# Allegro board flyer.brd
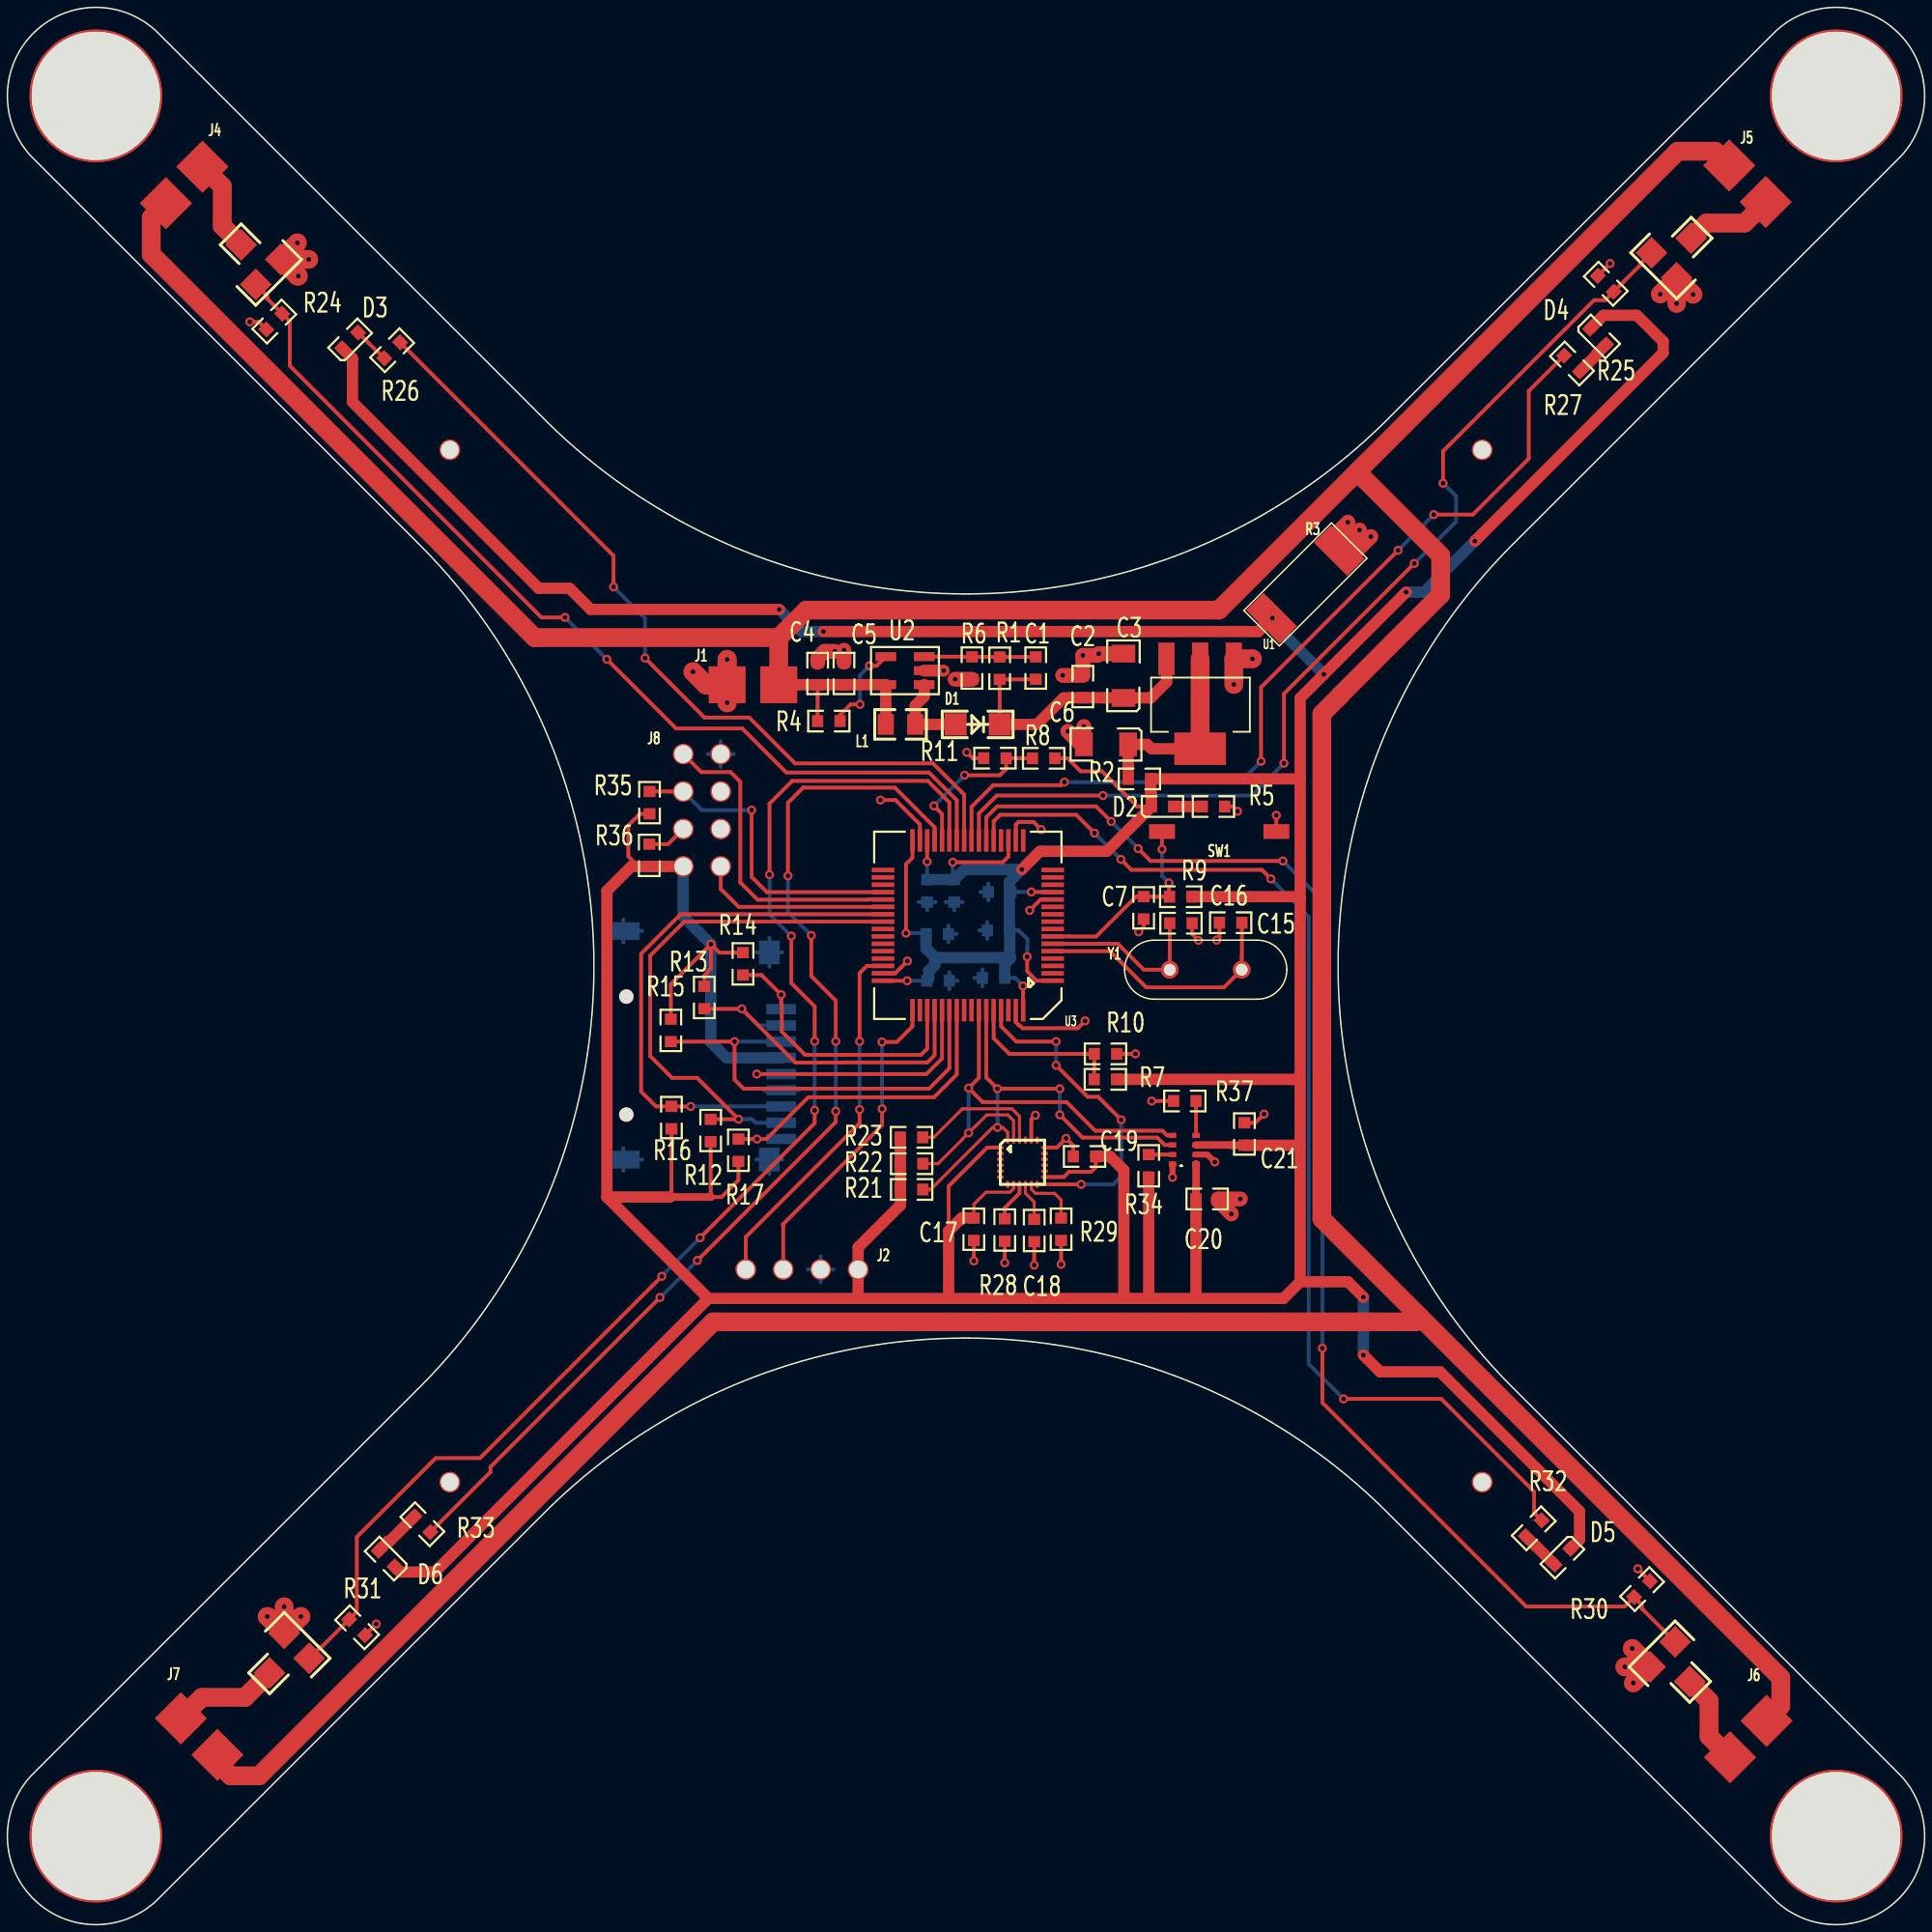
[diagram p0: board, top side]
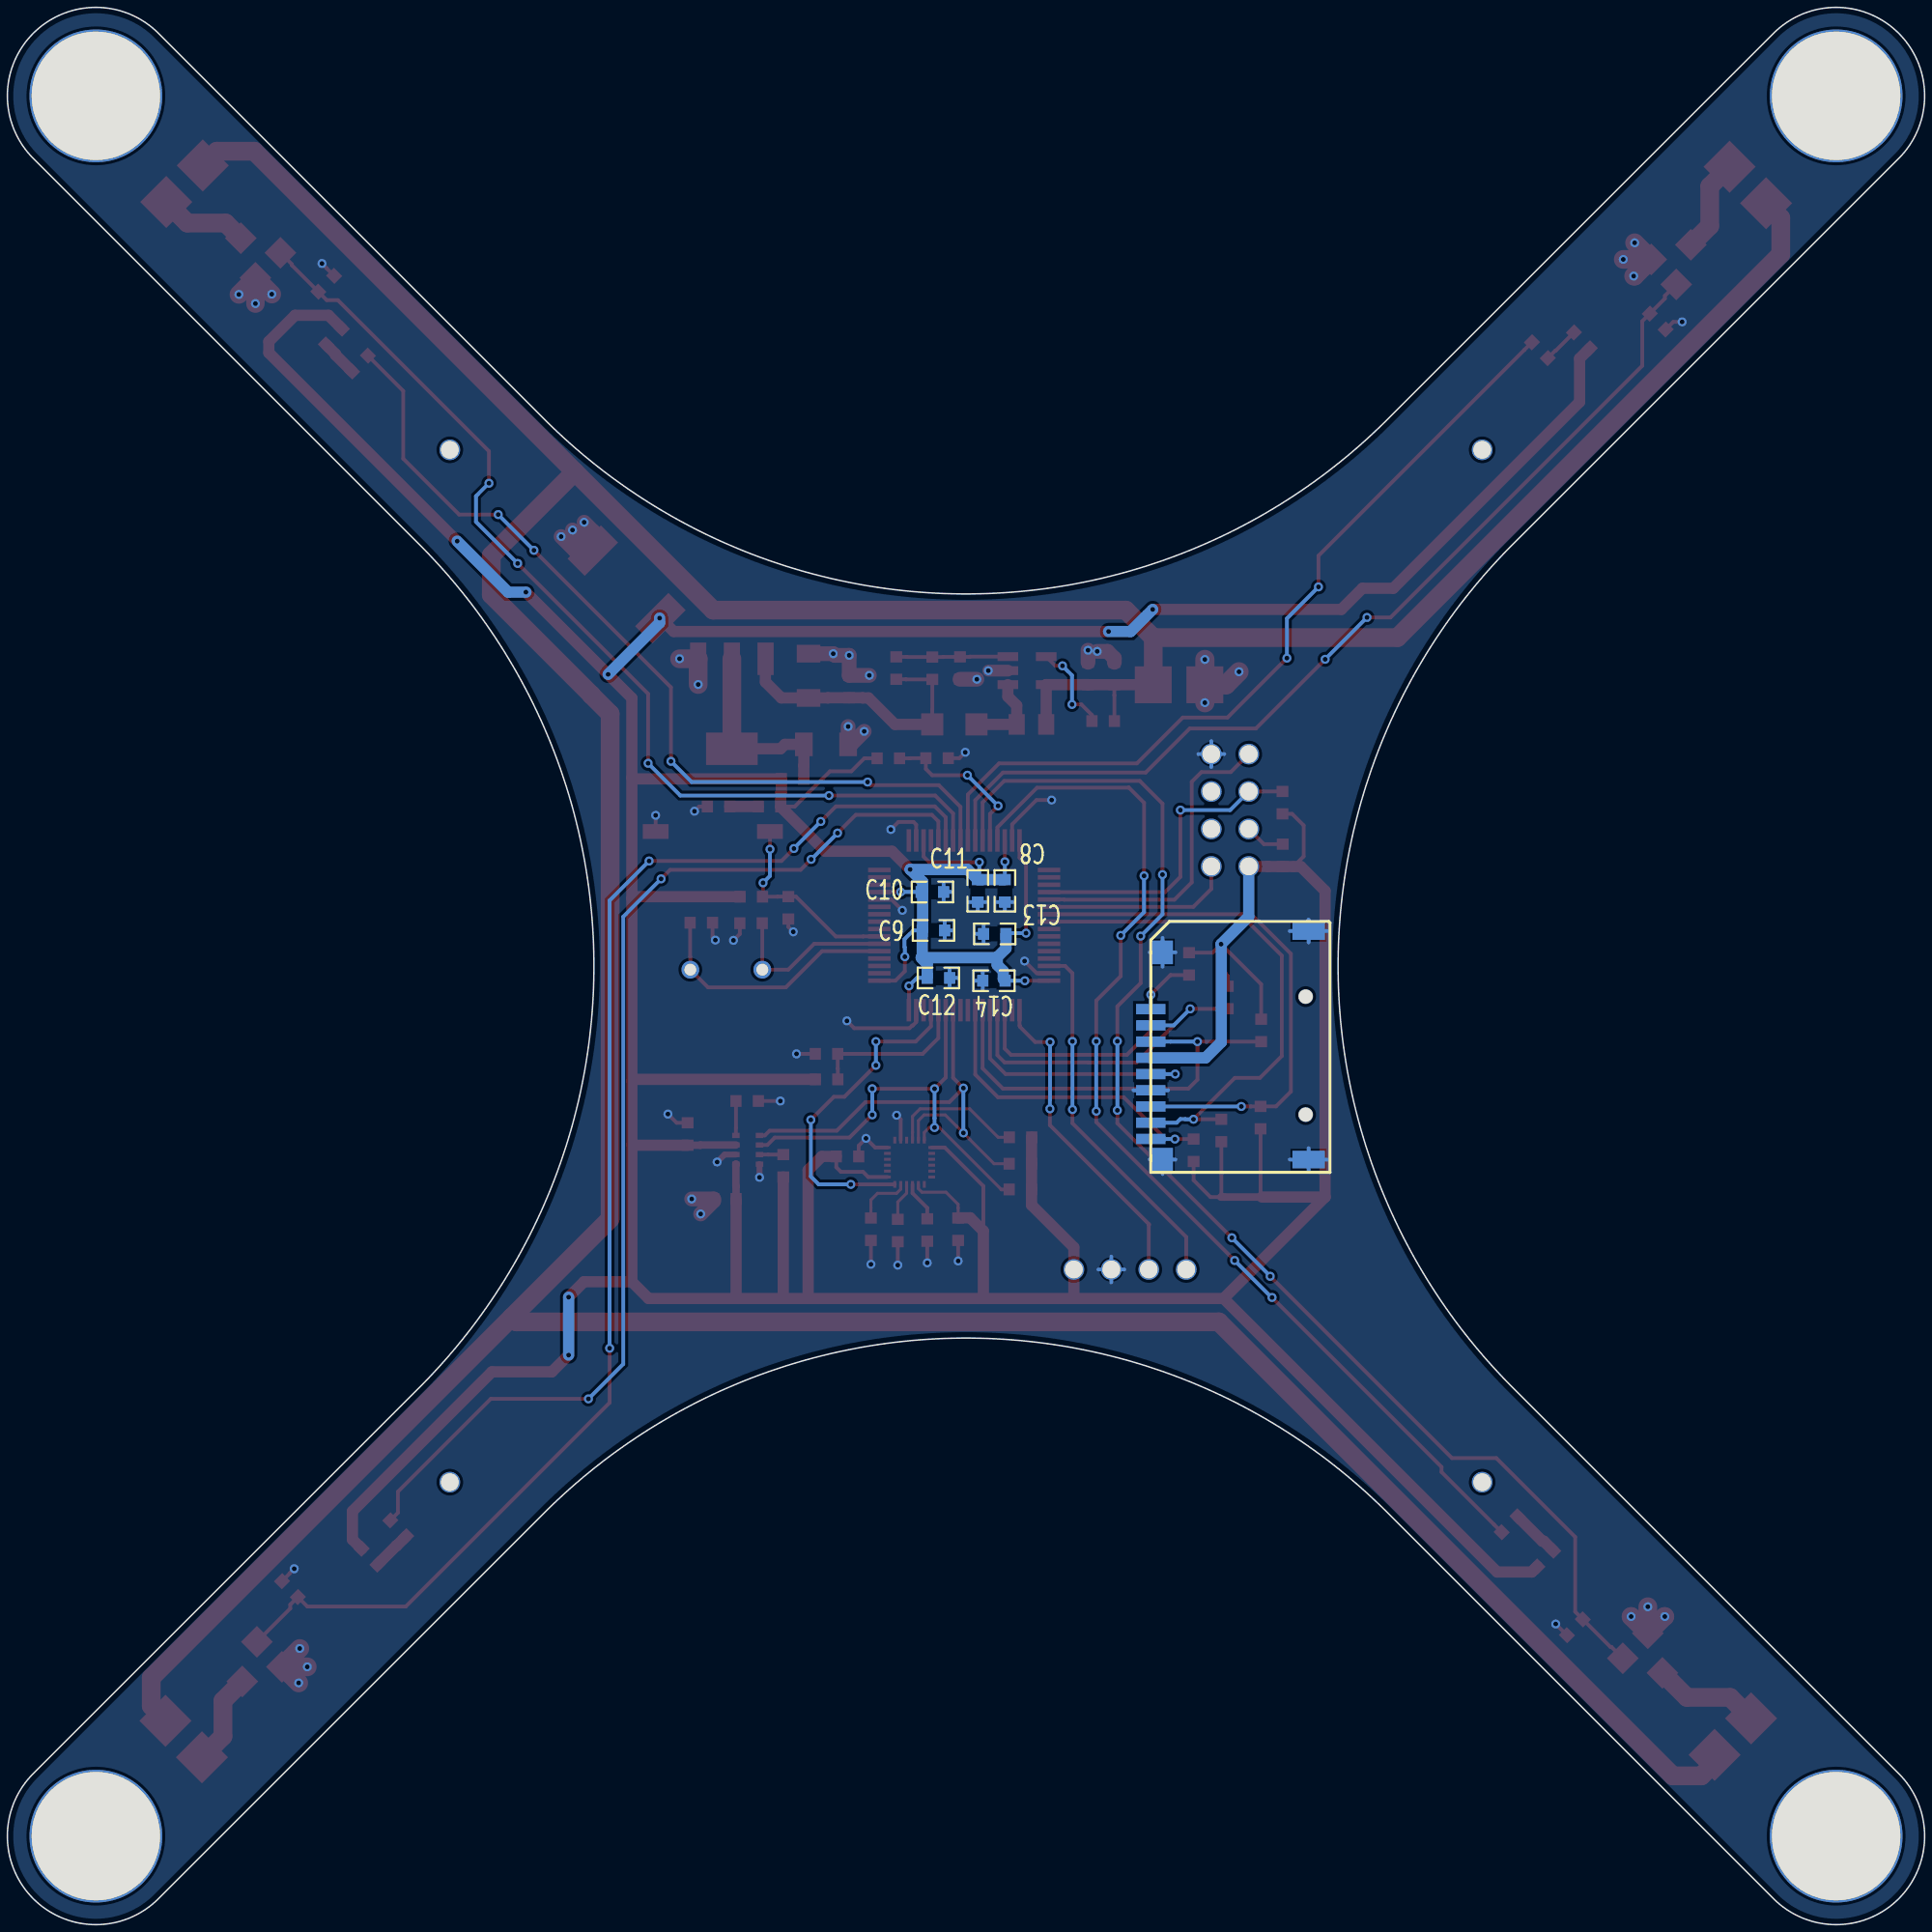
[diagram p1: board, bottom side, seen from below]

Outline 130 x 130 mm; copper layers: TOP, BOTTOM. Coordinates in mm from the lower left corner of the outline.

## Placement (name value [footprint] x y rotation side)
C1  470p  [NP0603]  69.73 85.2 90 top
C2  10u  [NP0603]  72.92 83.95 90 top
C3  10u  [P1206]  75.68 84.68 90 top
C4  100n  [NP0603]  54.94 84.84 90 top
C5  2.2u  [NP0603]  56.73 84.84 90 top
C6  22u  [P1206]  74.5 80.03 180 top
C7  10n  [NP0603]  77.05 68.95 90 top
C8  4.7u  [NP0603]  62.37 70.1 270 bottom
C9  1u  [NP0603]  67.21 67.42 180 bottom
C10  100n  [NP0603]  67.28 70.02 180 bottom
C11  100n  [NP0603]  64.2 70.1 270 bottom
C12  100n  [NP0603]  66.87 64.19 180 bottom
C13  100n  [NP0603]  63.05 67.18 0 bottom
C14  100n  [NP0603]  63.11 64 0 bottom
C15  20p  [NP0603]  82.95 67.94 180 top
C16  20p  [NP0603]  79.58 67.9 0 top
C17  10n  [NP0603]  65.54 47.16 270 top
C18  100n  [NP0603]  69.63 47.07 270 top
C19  100n  [NP0603]  73.04 52.09 180 top
C20  100n  [NP0603]  81.35 49.21 0 top
C21  100n  [NP0603]  83.88 53.61 90 top
D1  MBR0520  [SOD123]  65.89 81.38 180 top
D2  LED  [P0603]  78.32 75.82 0 top
D3  LED  [P0603]  23.24 107.42 45 top
D4  LED  [P0603]  107.86 107.68 315 top
D5  LED  [P0603]  105.44 24.95 225 top
D6  LED  [P0603]  25.72 24.82 135 top
J1  BAT  [PWR]  52.31 84.07 180 top
J2  SWD  [SIP_2D54_4P]  55.15 44.43 180 top
J3  TF_CARD  [TF]  52.47 62.08 90 bottom
J4  MOTOR1  [PWR]  10.75 116.72 45 top
J5  MOTOR2  [PWR]  116.75 119.28 315 top
J6  MOTOR3  [PWR]  119.28 13.82 225 top
J7  MOTOR4  [PWR]  14.24 11.51 135 top
J8  ESP8266  [DIP_2D54_8P]  45.83 79.37 270 top
L1  33uH  [NP0805]  60.56 81.38 0 top
NOREF  -  [unnamed]  65 65 0 top
NOREF#2  -  [unnamed#2]  30 100 0 top
NOREF#3  -  [unnamed#2]  30 30 0 top
NOREF#4  -  [unnamed#2]  100 30 0 top
NOREF#5  -  [unnamed#2]  100 100 0 top
R1  42k 1%  [NP0603]  67.29 85.19 90 top
R2  FUSE  [NP0603]  76.76 77.69 0 top
R3  5.6  [NP2512]  88.01 90.88 225 top
R4  51k  [NP0603]  55.7 81.61 0 top
R5  1k  [NP0603]  81.78 75.82 0 top
R6  13k 1%  [NP0603]  65.41 85.2 270 top
R7  10K  [NP0603]  74.45 57.32 0 top
R8  10K  [NP0603]  70.27 79.09 0 top
R9  10K  [NP0603]  79.56 69.7 180 top
R10  10K  [NP0603]  74.46 59.04 180 top
R11  10K  [NP0603]  66.96 79.09 0 top
R12  47k  [NP0603]  47.69 53.85 90 top
R13  47k  [NP0603]  47.25 62.87 270 top
R14  47k  [NP0603]  49.88 65.15 270 top
R15  47k  [NP0603]  44.99 60.63 270 top
R16  47k  [NP0603]  45.03 54.72 90 top
R17  10K  [NP0603]  49.57 52.51 90 top
R21  4k7  [NP0603]  61.32 49.85 0 top
R22  4k7  [NP0603]  61.32 51.6 0 top
R23  10K  [NP0603]  61.31 53.39 0 top
R24  10K  [NP0603]  18.1 108.7 225 top
R25  10K  [NP0603]  108.38 111.26 135 top
R26  1k  [NP0603]  26.09 106.76 45 top
R27  1k  [NP0603]  106.09 105.85 135 top
R28  10K  [NP0603]  67.63 47.1 270 top
R29  10K  [NP0603]  71.45 47.16 270 top
R30  10K  [NP0603]  110.84 22.75 45 top
R31  10K  [NP0603]  23.72 20.16 315 top
R32  1k  [NP0603]  103.5 26.88 45 top
R33  1k  [NP0603]  28.14 27.15 315 top
R34  10K  [NP0603]  77.39 51.46 90 top
R35  10K  [NP0603]  43.54 76.08 90 top
R36  10K  [NP0603]  43.53 72.5 90 top
R37  10K  [NP0603]  79.84 55.85 180 top
SW1  sw_rst  [SW_RST]  82.17 74.12 180 top
U1  AMS1117_3V3  [SOT223]  80.88 82.78 180 top
U2  LM27313  [SOT23_5]  60.86 85.03 90 top
U3  STM32F401RBT6_PX  [LQFP64]  65.13 67.76 180 top
U4  SI2302DS  [SOT23_3]  16.84 109.8 45 top
U5  SI2302DS  [SOT23_3]  110.07 113.36 315 top
U6  MPU9250  [QFN24]  68.83 51.7 0 top
U7  SI2302DS  [SOT23_3]  113.08 20.59 225 top
U8  SI2302DS  [SOT23_3]  21.88 18.06 135 top
U9  BMP280  [LGA8]  79.8 52.54 180 top
Y1  8M  [HC49]  81.26 64.75 0 top

## Library data of the parts
C1 C2 C4 C5 C7-C21 = CAP NP
C3 C6 = CAP
D1 = MBR0520
D2-D6 = LED
J1 J4-J7 = HEADER 2
J2 = 4 HEADER
J3 = TF_CARD
J8 = HEADER 4X2
L1 = CHOKE
R1-R17 R21-R37 = R
SW1 = SW PUSHBUTTON
U1 = AMS1117_3V3
U2 = LM27313
U3 = STM32F401RBT6_PX
U4 U5 U7 U8 = SI2302DS
U6 = MPU9250
U9 = BMP280
Y1 = ZTA

## Footprints (pads in the part's own frame, mm; a bottom-side part is the same pattern mirrored in y, then rotated)
DIP_2D54_8P
  round 1.4 hole 1.2: 1(0,0) 2(0,2.54) 3(2.54,0) 4(2.54,2.54) 5(5.08,0) 6(5.08,2.54) 7(7.62,0) 8(7.62,2.54)
HC49
  round 1.2 hole 0.8: 1(-2.44,0) 2(2.44,0)
LGA8
  rect 0.508x0.356 smd: 1(0.8,0.975) 2(0.8,0.325) 3(0.8,-0.325) 4(0.8,-0.975) 5(-0.8,-0.975) 6(-0.8,-0.325) 7(-0.8,0.325) 8(-0.8,0.975)
LQFP64
  rect 1.524x0.305 smd: 1(-5.753,3.753) 2(-5.753,3.252) 3(-5.753,2.752) 4(-5.753,2.252) 5(-5.753,1.751) 6(-5.753,1.251) 7(-5.753,0.751) 8(-5.753,0.25) 9(-5.753,-0.25) 10(-5.753,-0.751) 11(-5.753,-1.251) 12(-5.753,-1.751) 13(-5.753,-2.252) 14(-5.753,-2.752) 15(-5.753,-3.252) 16(-5.753,-3.753) 33(5.753,-3.753) 34(5.753,-3.252) 35(5.753,-2.752) 36(5.753,-2.252) 37(5.753,-1.751) 38(5.753,-1.251) 39(5.753,-0.751) 40(5.753,-0.25) 41(5.753,0.25) 42(5.753,0.751) 43(5.753,1.251) 44(5.753,1.751) 45(5.753,2.252) 46(5.753,2.752) 47(5.753,3.252) 48(5.753,3.753)
  rect 0.305x1.524 smd: 17(-3.753,-5.753) 18(-3.252,-5.753) 19(-2.752,-5.753) 20(-2.252,-5.753) 21(-1.751,-5.753) 22(-1.251,-5.753) 23(-0.751,-5.753) 24(-0.25,-5.753) 25(0.25,-5.753) 26(0.751,-5.753) 27(1.251,-5.753) 28(1.751,-5.753) 29(2.252,-5.753) 30(2.752,-5.753) 31(3.252,-5.753) 32(3.753,-5.753) 49(3.753,5.753) 50(3.252,5.753) 51(2.752,5.753) 52(2.252,5.753) 53(1.751,5.753) 54(1.251,5.753) 55(0.751,5.753) 56(0.25,5.753) 57(-0.25,5.753) 58(-0.751,5.753) 59(-1.251,5.753) 60(-1.751,5.753) 61(-2.252,5.753) 62(-2.752,5.753) 63(-3.252,5.753) 64(-3.753,5.753)
NP0603
  rect 0.76x0.8 smd: 1(-0.76,0) 2(0.76,0)
NP0805
  rect 1.092x1.397 smd: 1(-1,0) 2(1,0)
NP2512
  rect 1.65x3.2 smd: 1(3.24,0) 2(-3.24,0)
P0603
  rect 0.76x0.8 smd: 1(-0.76,0) 2(0.76,0)
P1206
  rect 1.2x1.6 smd: 1(-1.5,0) 2(1.5,0)
PWR
  rect 2.5x2.5 smd: 1(0,0) 2(3.5,0)
QFN24
  rect 0.457x0.203 smd: 1(-1.5,1) 2(-1.5,0.6) 3(-1.5,0.2) 4(-1.5,-0.2) 5(-1.5,-0.6) 6(-1.5,-1) 13(1.5,-1) 14(1.5,-0.6) 15(1.5,-0.2) 16(1.5,0.2) 17(1.5,0.6) 18(1.5,1)
  rect 0.203x0.457 smd: 7(-1,-1.5) 8(-0.6,-1.5) 9(-0.2,-1.5) 10(0.2,-1.5) 11(0.6,-1.5) 12(1,-1.5) 19(1,1.5) 20(0.6,1.5) 21(0.2,1.5) 22(-0.2,1.5) 23(-0.6,1.5) 24(-1,1.5)
SIP_2D54_4P
  round 1.4 hole 1.2: 1(-2.54,0) 2(0,0) 3(2.54,0) 4(5.08,0)
SOD123
  rect 1.499x1.499 smd: 1(-1.4,0) 2(1.6,0)
SOT23_3
  rect 1.524x1.524 smd: 1(1,1) 2(3.4,1) 3(2.2,3.6)
SOT23_5
  rect 0.6x1.4 smd: 1(-0.95,-1.3) 2(0,-1.3) 3(0.95,-1.3) 4(0.95,1.3) 5(-0.95,1.3)
SOT223
  rect 1.1x2.2 smd: 1(-2.285,-3.05) 2(0,-3.05) 3(2.285,-3.05)
  rect 3.5x2.2 smd: 4(0,3.05)
SW_RST
  rect 1.75x1 smd: 1(3.875,0) 2(-3.875,0)
TF
  round 1 hole 0.95 unplated: (-7.15,-10.5) (0.85,-10.5)
  rect 0.7x2 smd: 1(0,0) 2(-1.1,0) 3(-2.2,0) 4(-3.3,0) 5(-4.4,0) 6(-5.5,0) 7(-6.6,0) 8(-7.7,0) 9(-8.8,0)
  rect 1.6x1.4 smd: 10(-10.2,-0.8) 11(3.85,-0.8)
  rect 1.2x2.2 smd: 12(-10.2,-10.7) 13(5.3,-10.7)
unnamed
  round 9 hole 8.7: (-59,59) (-59,-59) (59,59) (59,-59)
unnamed#2
  round 1.4 hole 1.2: (0,0)

## Nets
GND: C2.2 C3.2 C4.2 C5.2 C6.2 C7.1 C8.2 C9.2 C10.2 C11.2 C12.2 C13.2 C14.2 C15.2 C16.2 C17.2 C18.2 C19.2 C20.2 C21.2 J1.2 J2.2 J3.6 J3.10 J3.11 J3.12 J3.13 J8.2 R3.2 R5.2 R6.2 R10.1 R11.1 R24.2 R25.2 R28.2 R29.2 R30.2 R31.2 R37.2 SW1.2 U1.1(GND) U2.2(GND) U3.12(VSSA) U3.18(VSS_18) U3.31(VSS_31) U3.47(VSS_47) U3.63(VSS_63) U4.2(SOURCE) U5.2(SOURCE) U6.18(GND1) U6.20(GND2) U7.2(SOURCE) U8.2(SOURCE) U9.1(GND1) U9.7(GND7)
V3D3: C8.1 C9.1 C10.1 C11.1 C12.1 C13.1 C14.1 C17.1 C19.1 C20.1 C21.1 D2.1 D3.1 D4.1 D5.1 D6.1 J2.1 J3.4 J8.7 R2.2 R3.1 R7.2 R8.2 R9.1 R12.1 R13.1 R14.1 R15.1 R16.1 R17.1 R21.1 R22.1 R23.1 R34.1 R35.1 R36.1 U3.1(VBAT) U3.13(VDDA) U3.19(VDD_19) U3.30(VCAP_1) U3.32(VDD_32) U3.48(VDD_48) U3.64(VDD_64) U6.1(RESV1) U6.8(VDDIO) U6.13(VDD) U9.6(VDDIO) U9.8(VDD)
V3D3P: C6.1 R2.1 U1.2(VOUT) U1.4(OUT)
V5D0: C1.1 C2.1 C3.1 D1.1 R1.1 U1.3(VIN)
VBAT: C4.1 C5.1 J1.1 J4.1 J5.1 J6.1 J7.1 L1.1 R4.1 U2.5(VIN)
BOOT0: R7.1 R10.2 U3.60(BOOT0)
BOOT1: R8.1 R11.2 U3.28(BOOT1)
CD: J3.9 R17.2 U3.55(PB3)
CHPD: J8.3 R35.2 U3.36(PB15)
CMD: J3.3 R15.2 U3.54(PD2)
D0: J3.7 R16.2 U3.39(PC8)
D1: J3.8 R12.2 U3.40(PC9)
D2: J3.1 R14.2 U3.51(PC10)
D3: J3.2 R13.2 U3.52(PC11)
ERST: J8.5 R36.2
INT0: U3.61(PB8) U6.12(INT)
LED1: R26.2 U3.25(PC5)
LED2: R27.2 U3.24(PC4)
LED3: R33.2 U3.29(PB10)
LED4: R32.2 U3.21(PA5)
NRST: C7.2 R9.2 SW1.1 U3.7(NRST)
OSC_IN: C15.1 U3.5(OSC_IN) Y1.2
OSC_OUT: C16.1 U3.6(OSC_OUT) Y1.1
PWM1: R24.1 U3.26(PB0) U4.1(GATE)
PWM2: R25.1 U3.23(PA7) U5.1(GATE)
PWM3: R31.1 U3.27(PB1) U8.1(GATE)
PWM4: R30.1 U3.22(PA6) U7.1(GATE)
RX1: J8.8 U3.38(PC7)
SCL1: R22.2 U3.58(PB6) U6.23(SCL) U9.4(SCL)
SDA1: R21.2 U3.59(PB7) U6.24(SDA) U9.3(SDA)
SWCLK: J2.3 U3.49(PA14)
SWDIO: J2.4 U3.46(PA13)
TCLK: J3.5 U3.53(PC12)
TX1: J8.1 U3.37(PC6)
N152508: J4.2 U4.3(DRAIN)
N152808: D3.2 R26.1
N153644: D2.2 R5.1
N164608: C1.2 R1.2 R6.1 U2.3(FB)
N164640: D1.2 L1.2 U2.1(SW)
N164696: R4.2 U2.4(NSHDN)
N165608: J5.2 U5.3(DRAIN)
N165666: D4.2 R27.1
N166858: J6.2 U7.3(DRAIN)
N166964: J7.2 U8.3(DRAIN)
N167022: D6.2 R33.1
N167070: D5.2 R32.1
N184406: R28.1 U6.9(ADO)
N184550: C18.1 U6.10(REGOUT)
N251743: R23.2 U6.22(NCS)
N267263: R37.1 U9.5(SDO)
N268631: R34.2 U9.2(CSB)
N270769: R29.1 U6.11(FSYNC)

Pads without a net: J8 4 6; U3 2 3 4 8 9 10 11 14 15 16 17 20 33 34 35 41 42 43 44 45 50 56 57 62; U6 2 3 4 5 6 7 14 15 16 17 19 21

## Via types
v1: diameter 0.61, hole 0.33, TOP to BOTTOM, 134 vias

## Routing (per net, layer and track width the routed paths; a pad name or vN(x,y) marks a point on that pad's centre or on a via; arc(x,y) is an arc through that point)
GND: length 134.2
  TOP w0.254: U3.18 68.38,74.59 68.56,74.77 69.59,74.77 v1(70.1,74.26) ; R37.2 v1(77.59,55.85) ; R10.1 v1(76.5,59.04) ; R28.2 v1(67.63,44.87) ; v1(82,66.76) 82.19,66.95 C15.2 ; U6.20 69.43,54.6 v1(69.71,54.88) ; C19.2 72.28,52.82 v1(71.78,53.31) 71.16,52.7 U6.18 ; U3.12 70.06,69.51 v1(69.32,68.78) ; v1(110.55,24.13) 110.86,23.82 110.86,23.81 R30.2 ; v1(16.45,108.68) 17.04,108.68 R24.2 ; C21.2 84.62,54.37 v1(85.21,54.96) ; U3.47 60.2,64.51 v1(61.03,65.34) ; v1(76.71,67.32) 77.05,67.66 C7.1 ; v1(108.67,112.63) 108.36,112.33 108.36,112.32 R25.2 ; SW1.2 v1(86.04,75.22) ; R29.2 v1(71.45,44.78) ; v1(80.77,66.74) 80.34,67.17 C16.2 ; U3.31 61.87,74.61 60.22,76.26 v1(59.2,76.26) ; C18.2 v1(69.63,44.72) ; v1(73.08,61.28) 72.58,60.79 68.83,60.79 68.65,60.97 68.61,60.97 68.38,61.2 U3.63 ; R31.2 v1(25.02,20.39) ; R11.1 65.45,79.09 v1(65.05,79.49) ; C17.2 v1(65.54,45) ; R5.2 83.09,75.82 v1(83.41,75.5)
  TOP w0.4: U9.1 v1(79,50.67) ; v1(81.87,51.71) 81.37,52.22 U9.7
  TOP w0.8: U2.2 v1(63.49,85.03)
  TOP w1: v1(71.56,84.71) C2.2 v1(72.92,86.07) 73.89,86.07 v1(74.01,86.18) C3.2 ; v1(92.46,94.12) 91.5,93.17 R3.2 90.31,93.19 ; v1(83.6,49.21) C20.2 82.11,49.07 v1(82.99,48.19) ; 90.31,93.19 v1(91.68,94.57) ; 90.31,93.19 90.31,94.5 v1(90.9,95.09) ; C4.2 54.94,85.87 55.41,86.34 v1(56.11,86.34) ; C5.2 v1(56.73,86.41) ; v1(73,81.24) C6.2 72.79,80.03 v1(71.91,80.91) ; R6.2 v1(64.27,84.44)
  TOP w1.25: v1(112.07,110.56) 113.18,111.67 U5.2 113.18,111.66 ; 113.18,111.66 v1(113.18,109.92) ; 113.18,111.66 v1(114.31,110.54)
  TOP w1.27: U4.2 v1(19.66,114.04) ; U4.2 19.67,111.78 v1(19.73,111.78) ; U4.2 v1(20.44,112.91) ; U8.2 19.9,20.89 v1(19.9,20.89) ; U8.2 17.64,20.89 v1(17.62,20.89) ; U8.2 v1(18.77,21.56) ; v1(83.16,84.09) U1.1 v1(84.42,85.83) ; v1(110.18,18.73) 111.39,17.52 U7.2 111.34,17.48 ; 111.34,17.48 v1(109.67,17.48) ; 111.34,17.48 v1(110.25,16.39)
  TOP w1.3: J1.2 v1(48.81,82.86) ; J1.2 47.37,84.07 v1(46.49,84.95) ; J1.2 v1(48.81,85.79)
  BOTTOM w0.254: J3.12 41.77,52.65 ; J3.12 40.49,51.88 ; J3.12 43.05,51.88 ; J3.12 41.77,51.1 ; 51.29,56.58 J3.6 53.65,56.58 ; J3.11 51.67,66.9 ; J3.11 51.67,64.95 ; J3.11 52.55,65.93 ; J3.11 50.79,65.93 ; C14.2 64.42,64 ; C14.2 63.87,63.43 ; C14.2 63.87,64.58 ; 40.49,67.38 J3.13 ; J3.13 41.77,68.15 ; J3.13 43.05,67.38 ; J3.13 41.77,66.6 ; 65.96,70.02 C10.2 ; C10.2 66.52,69.44 ; C10.2 66.52,70.6 ; 62.37,68.78 C8.2 ; C8.2 61.79,69.34 ; C8.2 62.94,69.34 ; 47.49,79.37 J8.2 ; J8.2 48.37,78.5 ; J8.2 48.37,80.25 ; J8.2 49.25,79.37 ; 65.89,67.42 C9.2 ; C9.2 66.45,67.99 ; C9.2 66.45,66.84 ; J2.2 55.15,45.3 ; J2.2 54.27,44.43 ; J2.2 55.15,43.55 ; J2.2 56.03,44.43 ; 50.79,51.88 J3.10 ; J3.10 52.55,51.88 ; J3.10 51.67,50.9 ; C11.2 64.78,69.34 ; C11.2 64.2,68.78 ; C11.2 63.63,69.34 ; 66.11,63.62 C12.2 ; C12.2 66.11,64.77 ; C12.2 65.55,64.19 ; 63.81,66.6 C13.2 ; C13.2 63.81,67.76 ; C13.2 64.37,67.18
V3D3: length 525.4
  TOP w0.203: C17.1 65.54,48.6 65.54,48.61 65.54,48.85 66.36,49.67 67.99,49.67 68.23,49.9 U6.8
  TOP w0.254: D2.1 76.61,75.82 74.22,78.2 72.78,78.2 71.89,79.09 R8.2 ; R16.1 45.03,49.43 44.93,49.34 ; v1(68.87,63.65) 68.87,62.02 U3.64 ; v1(69.43,70.02) 70.87,70.02 U3.13 ; 42.8,71.74 42.11,72.43 42.11,74.54 42.89,75.32 R35.1 ; v1(47.71,66.48) 44.99,63.77 R15.1 ; v1(47.71,66.48) 47.71,64.82 47.4,64.52 47.4,64.48 47.25,64.34 R13.1 ; v1(47.71,66.48) 48.28,65.91 R14.1 ; 47.47,49.34 47.69,49.56 R12.1 ; v1(61.01,64) 59.38,64 U3.48 ; C19.1 73.8,51.36 73.49,51.05 71.99,51.05 71.64,50.7 U6.13 ; v1(62.37,72.07) 62.37,73.5 U3.30 ; v1(64.1,72.04) 67.5,72.04 67.88,72.42 U3.19 ; U6.1 66.44,52.7 63.83,50.08 63.83,47.03 ; v1(60.93,67.23) 60.93,71.91 61.37,72.35 U3.32 ; v1(69.15,65.63) 69.15,64.65 69.79,64.01 U3.1 ; R17.1 49.57,50.48 48.43,49.34 47.73,49.34
  TOP w0.508: C20.1 80.59,50.06 80.6,50.07 U9.8 ; C21.1 83.02,52.85 83.01,52.87 U9.6 ; 44.93,49.34 47.73,49.34
  TOP w0.762: 87.66,77.77 87.66,69.59 ; 87.66,77.77 87.57,77.69 R2.2 77.52,76.77 77.56,76.72 D2.1 77.56,75.8 74.55,72.78 70.02,72.78 v1(68.79,71.55) ; 87.66,77.77 87.66,83.17 v1(89.27,84.78) v1(94.84,90.35) ; 87.66,69.59 87.66,57.23 ; 87.66,69.59 87.55,69.7 R9.1 ; 77.43,42.46 77.39,42.5 R34.1 ; 77.43,42.46 75.69,42.46 ; 77.43,42.46 80.61,42.46 ; 75.69,42.46 75.71,42.48 75.71,51.16 74.78,52.09 C19.1 ; 75.69,42.46 63.83,42.46 ; 87.66,57.23 87.57,57.32 R7.2 ; 87.66,57.23 87.66,52.91 ; 40.66,49.34 47.53,42.46 ; 40.66,49.34 44.93,49.34 ; 40.66,49.34 40.66,70.1 42.3,71.74 R36.1 44.51,71.74 44.52,71.75 J8.7 ; 47.53,42.46 28.99,23.91 26.63,23.91 D6.1 ; 47.53,42.46 57.7,42.46 ; v1(55.33,87.68) 84.82,87.68 R3.1 85.72,88.54 ; D5.1 106.6,26.11 106.6,28.03 97.15,37.49 93.08,37.49 v1(91.95,38.62) ; 80.61,42.46 86.52,42.46 87.66,43.59 ; 80.61,42.46 80.59,42.48 C20.1 ; 87.66,43.59 90.9,43.59 v1(91.95,42.55) ; 87.66,43.59 87.66,52.91 ; 87.66,52.91 87.6,52.85 C21.1 ; 57.7,42.46 57.69,42.47 J2.1 57.69,45.92 60.56,48.79 60.56,49.85 R21.1 R22.1 60.56,53.38 R23.1 ; 57.7,42.46 63.83,42.46 ; v1(52.34,89.18) 39.55,89.18 38.12,90.61 36.03,90.61 23.4,103.24 23.4,106.19 D3.1 ; 63.83,42.46 63.83,47.03 64.72,47.93 65.52,47.93 C17.1 ; v1(99.5,93.81) 112.27,106.58 112.27,107.34 110.5,109.12 108.23,109.12 D4.1
  BOTTOM w0.254: C12.1 68.33,64.19 v1(68.87,63.65) ; v1(64.1,72.04) 64.1,70.96 C11.1 ; C8.1 v1(62.37,72.07) ; v1(69.15,65.63) 69.15,66.27 69.17,66.29 69.17,66.81 68.57,67.42 C9.1 ; C14.1 v1(61.01,64) ; C13.1 62.24,67.23 v1(60.93,67.23) ; C10.1 v1(69.43,70.02)
  BOTTOM w0.762: 67.94,70.12 67.94,67.44 C9.1 67.97,65.5 67.81,65.34 ; 67.94,70.12 C10.1 ; 67.94,70.12 67.94,70.71 68.78,71.55 ; 62.89,65.6 62.29,66.2 C13.1 ; 62.89,65.6 62.92,65.57 68.04,65.57 67.81,65.34 ; 62.89,65.6 62.89,65.07 62.48,64.66 62.48,64.13 C14.1 ; v1(55.33,87.68) 53.84,87.68 v1(52.34,89.18) ; v1(94.84,90.35) 96.04,90.35 v1(99.5,93.81) ; 67.81,65.34 67.63,65.16 C12.1 ; J8.7 45.83,68.36 v1(47.71,66.48) 47.7,66.47 47.7,59.84 48.76,58.78 J3.4 ; v1(85.78,88.59) 85.78,88.27 v1(89.27,84.78) ; 68.78,71.55 v1(68.79,71.55) ; 68.78,71.55 64.9,71.55 C11.1 C8.1 ; v1(91.95,42.55) v1(91.95,38.62)
V3D3P: length 13.5
  TOP w0.762: U1.4 77.58,79.73 77.28,80.03 C6.1 76,78.6 76,78.6 R2.1
  TOP w1.27: U1.4 U1.2
V5D0: length 19.6
  TOP w0.254: D1.1 67.29,82.39 67.29,82.39 R1.1 69.07,84.43 69.08,84.44 C1.1
  TOP w0.762: D1.1 69.82,81.38 71.61,83.18 72.01,83.18 72.02,83.19 C2.1 74.36,83.19 74.37,83.18 C3.1 77.52,83.18 78.6,84.26 78.6,85.82 U1.3
VBAT: length 350.3
  TOP w0.254: C4.1 54.94,83.37 54.94,83.36 R4.1
  TOP w0.762: L1.1 U2.5 59.56,84.08 C5.1 56.73,84.08 C4.1 52.31,84.08
  TOP w1.27: J6.1 119.28,13.87 120.25,14.84 120.25,16.74 95.8,41.19 ; 95.8,41.19 89.13,47.86 89.13,82.1 90.4,83.37 90.4,83.39 97.19,90.18 97.19,92.84 91.56,98.48 91.56,98.54 ; 95.8,41.19 95.48,40.87 47.86,40.87 17.07,10.09 15.14,10.09 14.24,10.99 J7.1 ; 52.31,84.08 J1.1 52.31,87.27 ; 91.56,98.54 113.26,120.25 115.8,120.25 116.75,119.3 J5.1 ; 91.56,98.54 82.15,89.13 54.17,89.13 52.31,87.27 ; 52.31,87.27 35.75,87.27 9.76,113.26 9.76,115.73 J4.1
BOOT0: length 10.9
  TOP w0.254: U3.60 66.88,60.11 67.95,59.04 67.95,59.04 R10.2 73.7,58.05 73.69,58.05 R7.1
BOOT1: length 11
  TOP w0.254: 63.38,73.51 63.38,75.31 v1(62.83,75.86) ; R8.1 68.8,79.09 68.79,79.09 R11.2 67.73,78.36 67.3,77.94 v1(64.91,77.94)
  BOTTOM w0.254: v1(64.91,77.94) 64.72,77.75 64.72,77.75 v1(62.83,75.86)
CD: length 22.6
  TOP w0.254: R17.2 v1(50.84,53.27) 51.47,53.27 54.31,56.1 62.84,56.1 64.38,57.64 U3.55
  BOTTOM w0.254: v1(50.84,53.27) 52.46,53.27 J3.9
CHPD: length 21.3
  TOP w0.254: U3.36 51.5,70.01 50.47,71.05 v1(50.47,75.58) ; J8.3 44.88,76.83 44.87,76.84 R35.2
  BOTTOM w0.254: v1(50.47,75.58) 47.09,75.58 J8.3
CMD: length 29.4
  TOP w0.254: R15.2 v1(49.31,59.87) 49.31,57.3 49.92,56.69 62.5,56.69 63.88,58.06 U3.54
  BOTTOM w0.254: J3.3 51.14,59.88 51.14,59.87 v1(49.31,59.87)
D0: length 36.8
  TOP w0.254: v1(46.33,55.48) 45.69,55.48 45.68,55.48 R16.2 43.98,55.48 42.97,56.49 42.97,65.83 45.65,68.51 U3.39
  BOTTOM w0.254: J3.7 v1(46.33,55.48)
D1: length 36.2
  TOP w0.254: R12.2 47.69,54.61 v1(49.58,54.61) 46.77,57.42 45.07,57.42 43.59,58.9 43.59,65.71 45.89,68.01 U3.40
  BOTTOM w0.254: J3.8 50.72,54.38 50.47,54.62 50.15,54.62 50.14,54.61 v1(49.58,54.61)
D2: length 19.9
  TOP w0.254: R14.2 51.11,64.39 51.11,64.38 51.14,64.38 v1(52.47,63.06) 52.47,62.42 52.51,62.39 52.51,60.56 54.09,58.98 57.5,58.98 57.51,58.98 61.95,58.98 62.37,59.4 U3.51
  BOTTOM w0.254: J3.1 v1(52.47,63.06)
D3: length 23.5
  TOP w0.254: U3.52 62.88,58.95 62.39,58.47 56.72,58.47 56.71,58.46 53.44,58.46 v1(49.8,62.09) 48,62.09 47.98,62.11 R13.2
  BOTTOM w0.254: J3.2 50.92,60.98 v1(49.8,62.09)
ERST: length 2.7
  TOP w0.254: J8.5 44.8,73.26 R36.2
INT0: length 22.6
  TOP w0.254: v1(71.11,59.88) 68.42,59.88 67.38,60.92 U3.61 ; v1(75.52,54.57) 73.96,56.13 73.25,56.13 v1(71.11,58.27) ; U6.12 v1(72.81,50.2)
  BOTTOM w0.254: v1(75.52,54.57) 75.52,50.73 74.99,50.2 v1(72.81,50.2) ; v1(71.11,58.27) v1(71.11,59.88)
LED1: length 56.9
  TOP w0.254: v1(43.24,85.88) 47.27,81.85 50.3,81.85 53.41,78.74 62.76,78.74 64.88,76.63 U3.25 ; v1(41.1,90.71) 41.1,92.82 27.14,106.78 R26.2
  BOTTOM w0.254: v1(41.1,90.71) 43.24,88.57 v1(43.24,85.88)
LED2: length 60.8
  TOP w0.254: v1(71.67,77.48) 71.46,77.26 66.85,77.26 65.38,75.8 U3.24 ; v1(94.3,93.19) 85.01,83.9 v1(85.01,78.88) ; R27.2 103.16,103.99 103.16,99.4 99.37,95.61 v1(96.72,95.61)
  BOTTOM w0.254: v1(71.67,77.48) 83.6,77.48 v1(85.01,78.88) ; v1(94.3,93.19) v1(96.72,95.61)
LED3: length 74.6
  TOP w0.254: v1(44.25,42.53) 32.76,31.03 32.76,30.69 29.2,27.13 R33.2 ; v1(56.17,59.89) 56.17,62.65 54.51,64.31 v1(54.51,67.07) ; U3.29 62.88,74.4 60.19,77.09 53.99,77.09 53.97,77.11 52.93,76.07 v1(52.93,71.12) ; v1(56.17,55.15) 56.17,54.42 v1(46.79,45.04)
  BOTTOM w0.254: v1(52.93,71.12) 52.93,68.66 v1(54.51,67.07) ; v1(56.17,59.89) v1(56.17,55.15) ; v1(46.79,45.04) 44.28,42.53 v1(44.25,42.53)
LED4: length 77.1
  TOP w0.254: U3.21 66.88,74.81 67.32,75.25 72.48,75.25 v1(73.71,74.01) ; v1(85.68,70.91) 85.07,71.52 76.22,71.52 v1(75.5,72.24) ; R32.2 103.52,27.93 103.52,29.36 97.23,35.65 v1(90.6,35.65)
  BOTTOM w0.254: v1(85.68,70.91) 88.24,68.35 88.24,38.01 v1(90.6,35.65) ; v1(75.5,72.24) 75.49,72.24 v1(73.71,74.01)
NRST: length 13.7
  TOP w0.254: v1(78.76,70.64) 78.76,69.74 R9.2 77.79,69.7 77.78,69.71 C7.2 76.53,69.71 73.83,67 71.98,67 71.97,67.01 U3.7 ; SW1.1 v1(78.29,72.92)
  BOTTOM w0.254: v1(78.29,72.92) 78.29,71.11 v1(78.76,70.64)
OSC_IN: length 17.5
  TOP w0.254: C15.1 83.71,65.62 83.7,65.61 Y1.2 82.5,63.55 77.22,63.55 74.76,66.01 U3.5
OSC_OUT: length 11.8
  TOP w0.254: C16.1 78.82,65.61 78.82,65.61 Y1.1 77.05,64.75 75.3,66.51 U3.6
PWM1: length 66.6
  TOP w0.254: v1(37.81,88.64) 36.22,88.64 19.15,105.7 19.15,108.72 R24.1 17.61,110.26 17.61,110.44 U4.1 ; U3.26 64.38,76.24 62.5,78.12 52.82,78.12 49.83,81.11 45.34,81.11 v1(40.65,85.8)
  BOTTOM w0.254: v1(40.65,85.8) v1(37.81,88.64)
PWM2: length 70
  TOP w0.254: U5.1 110.71,112.59 110.71,112.52 R25.1 108.35,110.15 107.59,110.15 97.35,99.91 v1(97.35,97.74) ; v1(86.56,78.75) 86.56,83.46 v1(95.4,92.3) ; v1(74.29,76.56) 67.09,76.56 65.88,75.35 U3.23
  BOTTOM w0.254: v1(86.56,78.75) 84.37,76.56 v1(74.29,76.56) ; v1(97.35,97.74) 98.23,96.86 98.23,95.13 v1(95.4,92.3)
PWM3: length 91.2
  TOP w0.254: v1(46.97,46.58) 54.74,54.34 v1(54.74,55.22) ; v1(44.38,43.96) 32.05,31.64 29.04,31.64 23.7,26.29 23.7,21.22 R31.1 21.31,18.83 21.24,18.83 U8.1 ; v1(53.16,67.03) 53.16,63.84 54.74,62.26 v1(54.74,59.9) ; U3.27 63.88,76.09 62.41,77.55 53.22,77.55 51.68,76.01 v1(51.68,71.2)
  BOTTOM w0.254: v1(53.16,67.03) 51.68,68.51 v1(51.68,71.2) ; v1(44.38,43.96) 44.38,43.98 v1(46.97,46.58) ; v1(54.74,59.9) v1(54.74,55.22)
PWM4: length 92.7
  TOP w0.254: U7.1 110.82,21.44 110.82,21.7 R30.1 109.66,21.57 102.99,21.57 89.17,35.39 v1(89.17,39.09) ; U3.22 66.38,75.09 67.12,75.83 73.82,75.83 v1(74.85,74.8) ; v1(86.49,72.12) 77.52,72.12 v1(76.67,72.97)
  BOTTOM w0.254: v1(76.67,72.97) 76.67,72.98 v1(74.85,74.8) ; v1(86.49,72.12) 89.17,69.45 v1(89.17,39.09)
RX1: length 13
  TOP w0.254: U3.38 49.59,69.01 48.37,70.23 J8.8
SCL1: length 32.8
  TOP w0.203: R22.2 63.1,51.6 64.75,53.25 64.75,53.26 v1(65.18,53.69) 65.61,54.12 65.62,54.12 66.41,54.9 67.84,54.9 68.23,54.52 U6.23
  TOP w0.254: U3.58 65.88,57.42 v1(65.18,56.73) 66.13,55.77 71.82,55.77 73.76,53.83 78.32,53.83 78.64,53.52 U9.4
  BOTTOM w0.254: v1(65.18,53.69) v1(65.18,56.73)
SDA1: length 30.9
  TOP w0.203: 62.61,49.85 66.81,54.05 67.14,54.05 v1(67.14,54.05) 67.49,54.05 67.83,53.71 67.83,53.2 U6.24
  TOP w0.254: v1(71.36,56.68) v1(67.13,56.68) 66.38,57.44 U3.59 ; U9.3 78.47,52.87 77.97,53.37 72.9,53.37 v1(71.36,54.91) ; 62.61,49.85 R21.2
  BOTTOM w0.254: v1(67.13,56.68) 67.13,54.69 67.14,54.69 v1(67.14,54.05) ; v1(71.36,54.91) v1(71.36,56.68)
SWCLK: length 21.8
  TOP w0.254: v1(59.3,59.85) 60.31,59.85 61.34,60.88 61.34,60.94 61.37,60.97 U3.49 ; J2.3 52.61,47.45 52.6,47.46 52.6,47.49 59.31,54.21 v1(59.31,55.32)
  BOTTOM w0.254: v1(59.3,59.85) 59.3,55.96 59.31,55.95 v1(59.31,55.32)
SWDIO: length 25.1
  TOP w0.254: v1(57.79,59.89) 57.79,64.51 58.28,65.01 U3.46 ; J2.4 50.07,46.63 57.79,54.34 v1(57.79,55.27)
  BOTTOM w0.254: v1(57.79,59.89) v1(57.79,55.27)
TCLK: length 17.9
  TOP w0.254: U3.53 63.38,58.73 62.32,57.68 v1(50.82,57.68)
  BOTTOM w0.254: v1(50.82,57.68) J3.5
TX1: length 21.6
  TOP w0.254: U3.37 58.36,69.51 58.34,69.5 50.87,69.5 49.7,70.67 49.7,77.49 49.04,78.15 47.05,78.15 J8.1
N152508: length 6.4
  TOP w1.27: U4.3 14.57,115.18 14.57,117.86 13.24,119.2 J4.2
N152808: length 2.5
  TOP w0.254: R26.1 25.04,106.74 25,106.74 D3.2
N153644: length 1.9
  TOP w0.762: D2.2 R5.1
N164608: length 7.6
  TOP w0.254: U2.3 64.74,85.98 64.76,85.96 66.55,85.96 66.56,85.95 R1.2 68.99,85.95 69,85.96 C1.2
N164640: length 5.7
  TOP w0.762: D1.2 L1.2 61.56,82.67 62.16,83.27 U2.1
N164696: length 6.3
  TOP w0.254: R4.2 56.46,82.02 57.18,82.74 v1(57.82,82.74) ; v1(58.46,85.36) 58.94,85.36 U2.4
  BOTTOM w0.254: v1(58.46,85.36) 57.82,84.71 v1(57.82,82.74)
N165608: length 6.1
  TOP w1.27: J5.2 117.8,115.38 115.21,115.38 114.18,114.35 U5.3
N165666: length 2.6
  TOP w0.762: D4.2 107.76,106.5 107.76,106.44 R27.1
N166858: length 6.3
  TOP w1.27: J6.2 115.38,12.77 115.38,15.18 U7.3
N166964: length 7.3
  TOP w1.27: U8.3 16.12,15.41 13.19,15.41 J7.2
N167022: length 3.4
  TOP w0.762: R33.1 25.92,26 25.83,26 D6.2
N167070: length 2.7
  TOP w0.762: D5.2 103.62,25.7 103.6,25.7 R32.1
N184406: length 2.7
  TOP w0.254: R28.1 67.63,48.6 68.63,49.6 U6.9
N184550: length 2.6
  TOP w0.203: C18.1 69.63,49 69.03,49.6 U6.10
N251743: length 9.2
  TOP w0.203: R23.2 62.82,53.39 64.75,55.32 68.12,55.32 68.63,54.81 68.63,53.73 68.63,53.73 U6.22
N267263: length 2.3
  TOP w0.254: U9.5 80.6,54.02 80.6,54.03 R37.1
N268631: length 1.6
  TOP w0.254: R34.2 78.42,52.22 78.42,52.22 U9.2
N270769: length 3.9
  TOP w0.203: U6.11 69.43,49.87 69.71,49.59 71,49.59 71.45,49.14 71.45,48.6 R29.1

## Copper pours and planes (outline as drawn; the poured copper is in the pictures)
GND on BOTTOM: 9.96,2.04 2.04,2.04 2.04,9.96 28.22,36.14 40.17,65 28.22,93.87 2.04,120.04 2.04,127.96 9.96,127.96 36.14,101.79 65,89.83 93.87,101.79 120.04,127.96 127.96,127.96 127.96,120.04 101.79,93.87 89.83,65 101.79,36.14 127.96,9.96 127.96,2.04 120.04,2.04 93.87,28.22 65,40.17 36.14,28.22
